# Altium PCB lononTV.PcbDoc
Units mm, origin at the board's own origin, x right, y up, seen from the top; angles counter-clockwise.
Board outline 59.36 x 60.2 mm, 2 copper layers (Top Layer, Bottom Layer); 59 components, 56 nets, 266 pads, 221 vias.
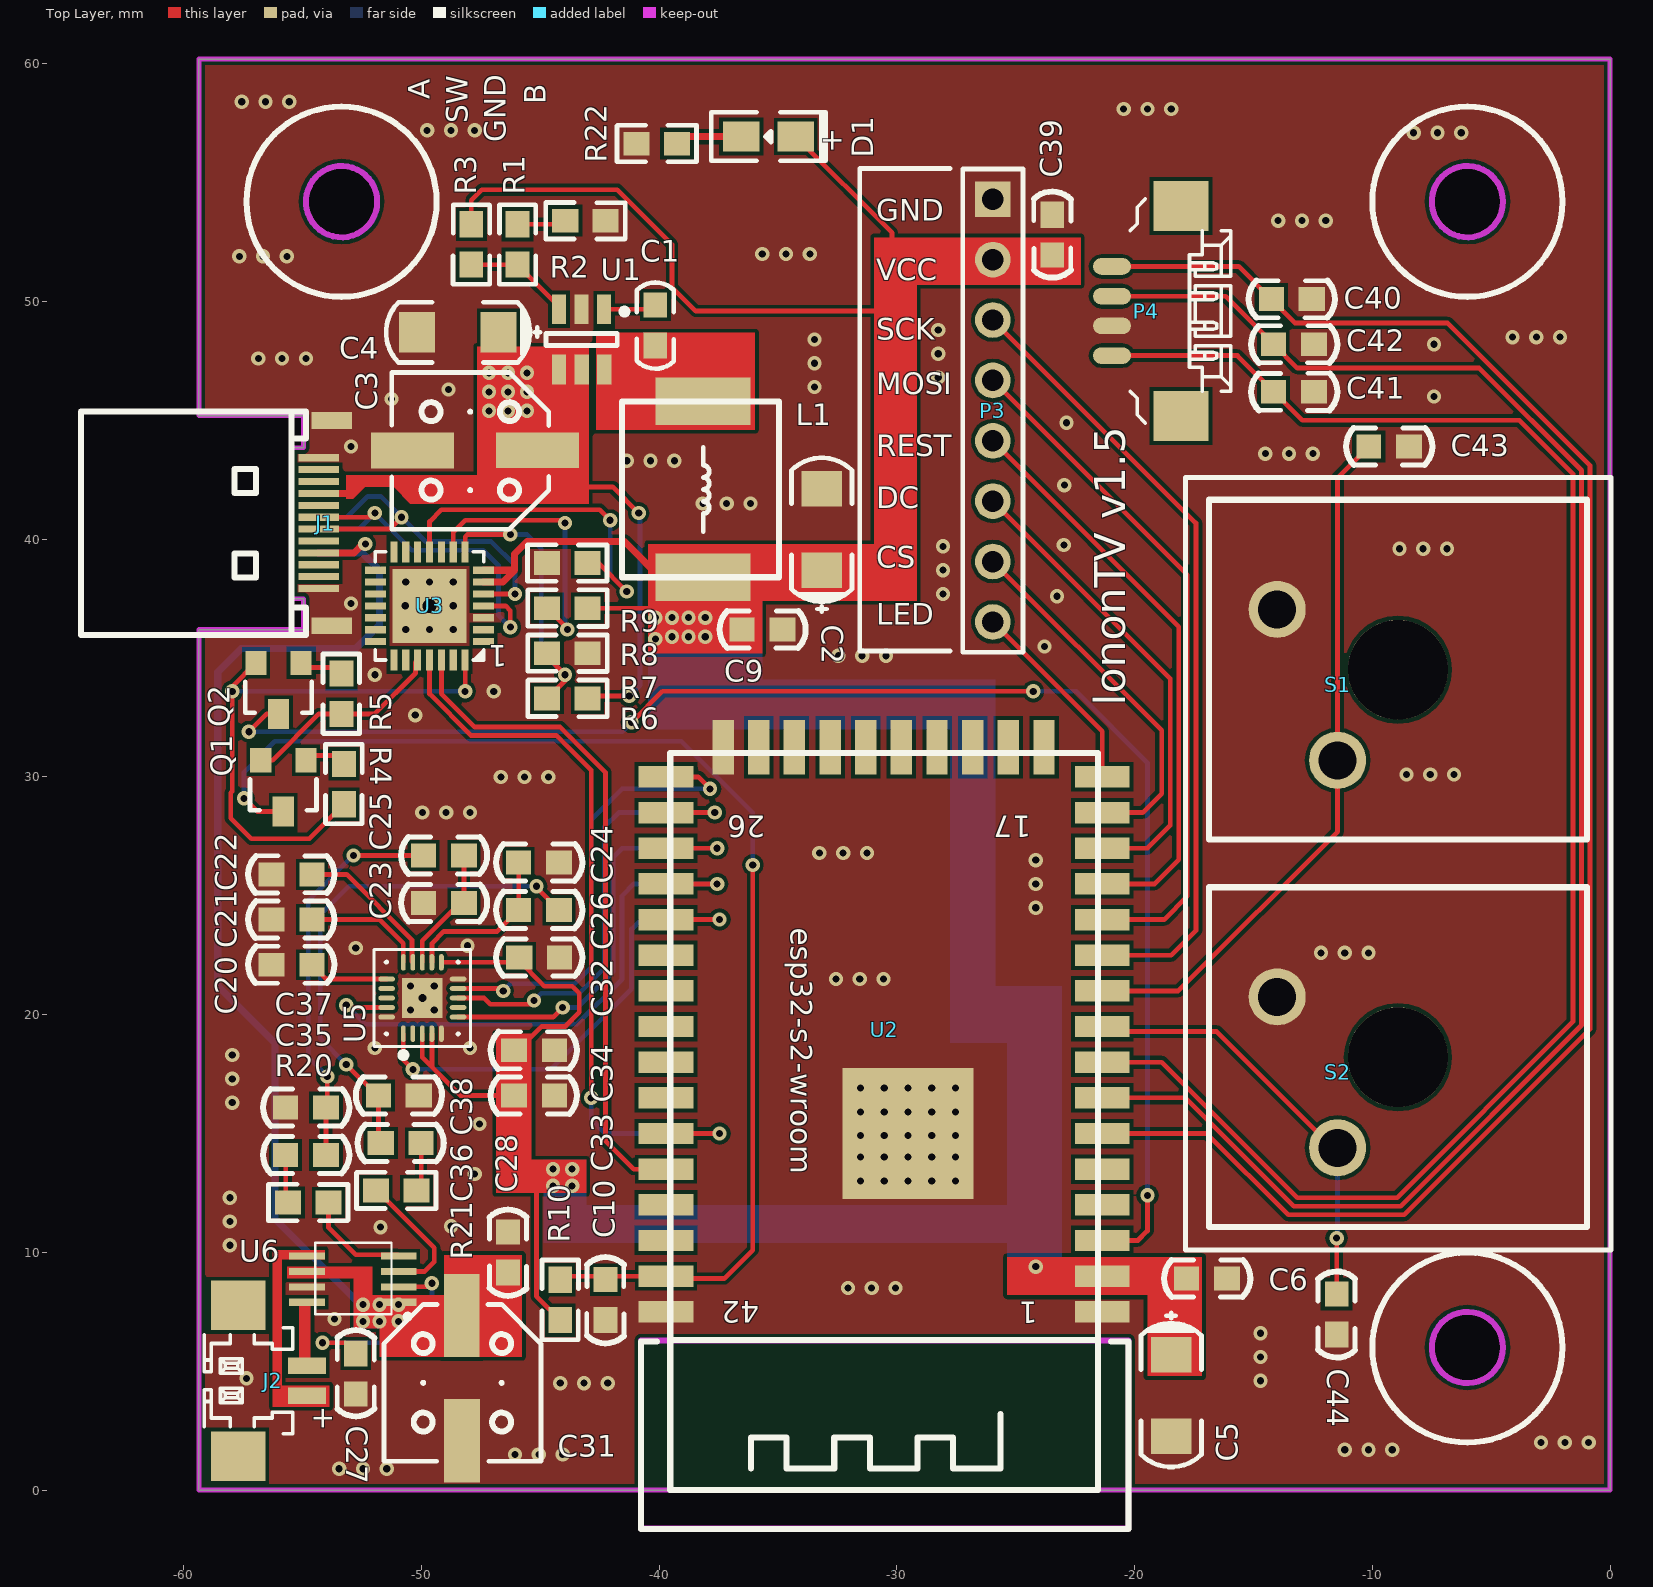
[diagram p0: Top Layer view]
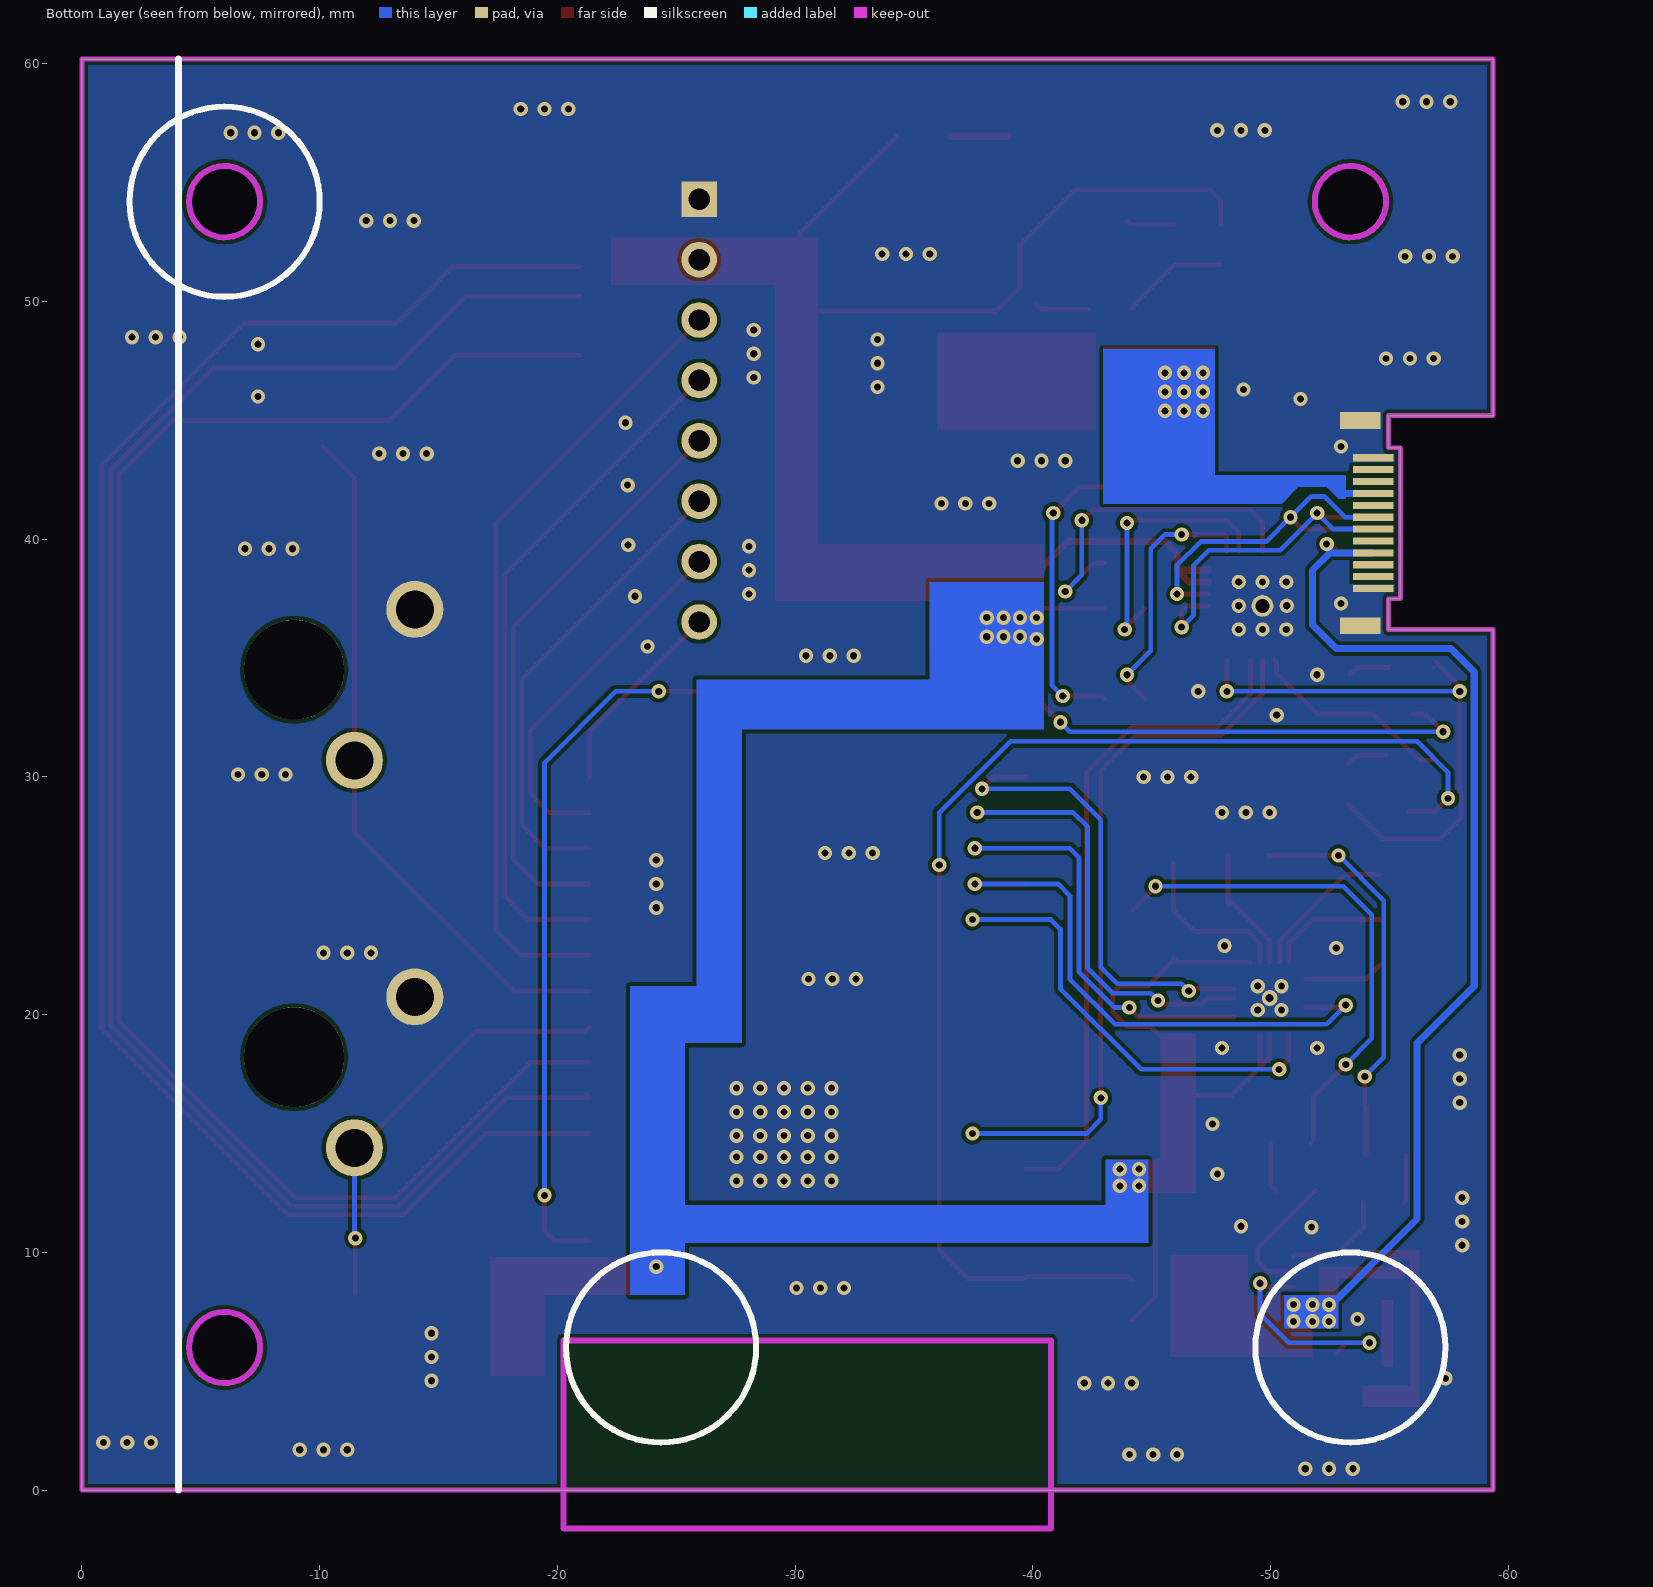
[diagram p1: Bottom Layer view, seen from below]

## Layer stack, top to bottom
Top Layer: signal copper 0.0356
Dielectric: dielectric 0.32, FR-4, Dk 4.8
Bottom Layer: signal copper 0.0356

## Board outline
-59.36,18.6 -59.36,36.2 -54.96,36.2 -54.96,37.5 -55.46,37.5 -55.46,43.85 -54.96,43.85 -54.96,45.2 -59.36,45.2 -59.36,60.2 0,60.2 0,0 -59.36,0
cut-out: -7.5,54.2 ccw(c-6,54.2) -6,52.7 ccw(c-6,54.2) -4.5,54.2 ccw(c-6,54.2) -6,55.7 ccw(c-6,54.2)
cut-out: -53.36,52.7 cw(c-53.36,54.2) -54.86,54.2 cw(c-53.36,54.2) -53.36,55.7 cw(c-53.36,54.2) -51.86,54.2 cw(c-53.36,54.2)
cut-out: -7.5,6 ccw(c-6,6) -6,4.5 ccw(c-6,6) -4.5,6 ccw(c-6,6) -6,7.5 ccw(c-6,6)

## Design rules (kind name [scope] priority, off if disabled: settings)
Clearance [All] p1: gap=0.16
ComponentClearance [All] p1 off: gap=0.254 collisioncheckmode=3 verticalgap=0.254 showdistances=FALSE
PolygonConnect [All] p1: connectstyle=Direct reliefconductorwidth=0.254 reliefentries=4 polygonreliefangle="90 Angle"
RoutingVias [All] p1: holewidth=0.3 width=0.6 viastyle="Through Hole" minholewidth=0.3 minwidth=0.6 maxholewidth=0.3 maxwidth=0.6
SilkscreenOverComponentPads [All] p1: minsilkscreentomaskgap=0.254
SolderMaskExpansion [All] p1: expansion=0.102
Width [All] p1: maxlimit=0.3 minlimit=0.2 preferedwidth=0.2
26 further rules are at their usual default settings.

## Components (designator, comment, footprint, x,y, rotation, side; value= is the part's Value field where it differs from the comment)
C1 "100nF" 0603C -40.16,49 r270 top
C2 "10uF" 1206-A -33.16,38.7 r90 top
C3 "220uF" 铝电容6.6 -47.76,43.7 r0 top
C4 "10uF" 1206-A -46.76,48.7 r180 top
C5 "10uF/16v" 1206-A -18.46,5.7 r270 top
C6 "104" "C0603 - duplicate" -16.96,8.9 r0 top
C9 "104" "C0603 - duplicate" -35.66,36.2 r0 top
C10 "105" "C0603 - duplicate" -42.26,8 r270 top
C20 "105" "C0603 - duplicate" -55.46,22.1 r180 top
C21 "105" "C0603 - duplicate" -55.46,24 r180 top
C22 "105" "C0603 - duplicate" -55.46,25.9 r180 top
C23 "22p" "C0603 - duplicate" -49.06,24.7 r0 top
C24 "22p" "C0603 - duplicate" -45.06,26.4 r0 top
C25 "105" "C0603 - duplicate" -49.06,26.7 r0 top
C26 "105" "C0603 - duplicate" -45.06,24.4 r0 top
C27 "105" "C0603 - duplicate" -52.76,4.9 r90 top
C28 "104" "C0603 - duplicate" -46.36,10 r270 top
C31 "220uF" 铝电容6.6 -48.26,4.7 r90 top
C32 "105" "C0603 - duplicate" -45.032,22.4 r180 top
C33 "104" "C0603 - duplicate" -45.26,16.6 r180 top
C34 "104" "C0603 - duplicate" -45.26,18.5 r180 top
C35 "104" "C0603 - duplicate" -54.86,14.1 r0 top
C36 "104" "C0603 - duplicate" -50.86,14.6 r180 top
C37 "22p" "C0603 - duplicate" -54.86,16.1 r0 top
C38 "22p" "C0603 - duplicate" -50.96,16.6 r0 top
C39 "104" "C0603 - duplicate" -23.46,52.8 r90 top
C40 "104" "C0603 - duplicate" -13.4,50.1 r0 top
C41 "104" "C0603 - duplicate" -13.3,46.2 r0 top
C42 "104" "C0603 - duplicate" -13.3,48.2 r0 top
C43 "104" "C0603 - duplicate" -9.3,43.9 r0 top
C44 "104" "C0603 - duplicate" -11.5,7.4 r270 top
D1 "" d0805 -35.4,56.94 r180 top
J1 "" TYPE-C夹板C2856664 -53.76,45 r270 top
J2 "SPK" "MX1.25-2P 立" -56.26,4.6 r90 top
L1 "6.8uH" 电感7.4*6.6 -34.96,45.8 r270 top
P3 "Header 8" HDR1X8 -25.96,54.3 r270 top
P4 "Header 4" "MX1.25-4P 卧" -19.5,49.6 r270 top
Q1 "8050" 3904 -54.86,30.7 r180 top
Q2 "8050" 3904 -55.06,34.8 r180 top
R1 "10k" 0603R -45.96,52.401 r270 top
R2 "1.3k" 0603R -43.1,53.4 r180 top
R3 "51k" 0603R -47.9,52.4 r270 top
R4 "10K" R0603 -53.26,29.7 r90 top
R5 "10K" R0603 -53.366,33.499 r90 top
R6 "22.1K" R0603 -43.86,33.3 r0 top
R7 "47.5K" R0603 -43.86,35.2 r0 top
R8 "2K" R0603 -43.86,37.1 r0 top
R9 "10K" R0603 -43.86,39 r180 top
R10 "10K" 0603R -44.16,8 r90 top
R20 "150K" 0603R -54.76,12.1 r180 top
R21 "150K" 0603R -51.06,12.6 r0 top
R22 "330R" 0603R -40.1,56.64 r0 top
S1 "6X6X6mm" C400237_KT红轴 -11.46,30.7 r90 top
S2 "6X6X6mm" C400237_KT红轴 -11.46,14.4 r90 top
U1 "STI3470" SOT-23-6L -43.26,48.4 r270 top
U2 "esp32-s2-wroom" ESP32-S2-WROOM -21.46,7.5 r180 top
U3 "CP2102N" "QFN 28-pin-05P" -49.66,37.2 r90 top
U5 "ES8311" QFN20_3*3 -50.76,19.2 r90 top
U6 "NS4150" MSOP8 -50.96,7.9 r180 top

## Footprints (in the part's own frame and the unit in brackets; to place one, negate y for a bottom-side part, rotate by r counter-clockwise, add the part's x,y. Pads: shape width x height; smd on the part's side, far side on the other; paste and mask are expansions set on the pad)
0603C [mm]
  rect 1.05x1 smd: 1(-0.85,0)
  rect 1.1x1 smd: 2(0.85,0)
  silkscreen extent -1.8,-0.78 1.83,0.78
0603R [mm]
  rect 1.1x1 smd: 1(-0.85,0) 2(0.85,0)
  silkscreen extent -1.67,-0.77 1.67,0.77
1206-A [mm]
  rect 1.5x1.7 smd: 1(0,0) 2(3.429,0)
  silkscreen extent -1.76,-1.27 4.72,1.27
3904 [mm]
  rect 0.889x1.016 smd: 1(0,0) 3(1.9,0)
  rect 0.9x1.27 smd: 2(0.95,2.15)
  silkscreen extent -0.45,0.8 2.35,2.1
"C0603 - duplicate" [mm]
  rect 1.05x1 smd: 1(-0.85,0)
  rect 1.1x1 smd: 2(0.85,0)
  silkscreen extent -1.8,-0.78 1.83,0.78
C400237_KT红轴 [mm]
  round 2.4 hole 1.6: 1(0,0) 2(6.35,2.54)
  round 4.2 hole 4.2 unplated: ""(3.81,-2.54)
  silkscreen extent -3.34,-10.49 10.96,5.4
d0805 [mil]
  rect 60x50 smd: A(-45,0) K(45,0)
  silkscreen extent -95,-40 95,40
ESP32-S2-WROOM [mm]
  rect 2.3x0.9 smd: 1(-0.1,0) 2(-0.1,-1.5) 3(-0.1,-3) 4(-0.1,-4.5) 5(-0.1,-6) 6(-0.1,-7.5) 7(-0.1,-9) 8(-0.1,-10.5) 9(-0.1,-12) 10(-0.1,-13.5) 11(-0.1,-15) 12(-0.1,-16.5) 13(-0.1,-18) 14(-0.1,-19.5) 15(-0.1,-21) 16(-0.1,-22.5) 27(18.25,-22.5) 28(18.25,-21) 29(18.25,-19.5) 30(18.25,-18) 31(18.25,-16.5) 32(18.25,-15) 33(18.25,-13.5) 34(18.25,-12) 35(18.25,-10.5) 36(18.25,-9) 37(18.25,-7.5) 38(18.25,-6) 39(18.25,-4.5) 40(18.25,-3) 41(18.25,-1.5) 42(18.25,0)
  rect 0.9x2.3 smd: 17(2.35,-23.75) 18(3.85,-23.75) 19(5.35,-23.75) 20(6.85,-23.75) 21(8.35,-23.75) 22(9.85,-23.75) 23(11.35,-23.75) 24(12.85,-23.75) 25(14.35,-23.75) 26(15.85,-23.75)
  rect 5.5x5.5 smd: 43(8.073,-7.5)
  Keep-Out Layer lines w0.254: 19.3,9.11 -1.2,9.11 -1.2,1.21 19.3,1.21 19.3,9.11
  silkscreen extent -1.2,-23.51 19.3,9.14
HDR1X8 [mm] "Connector; Header; 8 Position"
  rect 1.5x1.5 hole 0.9: 1(0,0)
  round 1.5 hole 0.9: 2(2.54,0) 3(5.08,0) 4(7.62,0) 5(10.16,0) 6(12.7,0) 7(15.24,0) 8(17.78,0)
  silkscreen extent -1.27,-1.27 19.05,1.27
MSOP8 [mm]
  rect 1.5x0.3 smd: 1(0,0) 2(0,-0.65) 3(0,-1.3) 4(0,-1.95) 5(3.85,-1.95) 6(3.85,-1.3) 7(3.85,-0.65) 8(3.85,0)
  silkscreen extent -0.46,-2.5 3.5,0.68
"MX1.25-2P 立" [mm]
  rect 2.1x2.3 smd: 0(-3.175,1.45) 0(3.175,1.45)
  rect 0.7x1.6 smd: 1(-0.625,-1.45) 2(0.625,-1.45)
  silkscreen extent -2.23,-0.84 2.23,2.88
"MX1.25-4P 卧" [mm]
  rect 2.1x2.3 smd: 0(-4.425,1.45) 0(4.425,1.45)
  oval 0.7x1.6 smd: 1(1.875,-1.45) 2(0.625,-1.45) 3(-0.625,-1.45) 4(-1.875,-1.45)
  silkscreen extent -4.71,-0.69 4.71,3.55
QFN20_3*3 [mm]
  oval 0.7x0.2 smd: 1(0,0) 2(0,-0.4) 3(0,-0.8) 4(0,-1.2) 5(0,-1.6) 11(3,-1.6) 12(3,-1.2) 13(3,-0.8) 14(3,-0.4) 15(3,0)
  oval 0.2x0.7 smd: 6(0.7,-2.3) 7(1.1,-2.3) 8(1.5,-2.3) 9(1.9,-2.3) 10(2.3,-2.3) 16(2.3,0.7) 17(1.9,0.7) 18(1.5,0.7) 19(1.1,0.7) 20(0.7,0.7)
  rect 1.7x1.7 smd: 21(1.5,-0.8)
  silkscreen extent -1.02,-2.83 3.53,1.23
"QFN 28-pin-05P" [mm]
  rect 0.3x0.88 smd: 1(-1.506,-2.276) 2(-1.006,-2.276) 3(-0.506,-2.276) 4(-0.006,-2.276) 5(0.494,-2.276) 6(0.994,-2.276) 7(1.494,-2.276) 15(1.494,2.274) 16(0.994,2.274) 17(0.494,2.274) 18(-0.006,2.274) 19(-0.506,2.274) 20(-1.006,2.274) 21(-1.506,2.274)
  rect 0.88x0.3 smd: 8(2.269,-1.501) 9(2.269,-1.001) 10(2.269,-0.501) 11(2.269,-0.001) 12(2.269,0.499) 13(2.269,0.999) 14(2.269,1.499) 22(-2.281,1.499) 23(-2.281,0.999) 24(-2.281,0.499) 25(-2.281,-0.001) 26(-2.281,-0.501) 27(-2.281,-1.001) 28(-2.281,-1.501)
  round 0.6 hole 0.3: 29(-0.996,-0.998) 29(-0.996,0.002) 29(-0.996,1.002) 29(0.004,1.018) 29(0.004,-0.998) 29(1.004,-0.998) 29(1.004,0.002) 29(1.004,1.002)
  round 0.914 hole 0.6: 29(-0.006,-0.001)
  rect 3.1x3.1 smd: 29(-0.006,-0.001)
  silkscreen extent -2.28,-2.28 2.27,2.27
R0603 [mm]
  rect 1.1x1 smd: 1(-0.85,0) 2(0.85,0)
  silkscreen extent -1.67,-0.77 1.67,0.77
SOT-23-6L [mm] "SOT23, 6-Leads, Body 3.0x2.9mm (max), Pitch 0.95mm, IPC Medium Density"
  rect 1.25x0.6 smd: 1(-1.272,0.945) 2(-1.272,-0.005) 3(-1.272,-0.955) 4(1.265,-0.95) 5(1.265,0) 6(1.265,0.95)
  silkscreen extent -1.3,-1.5 0.25,1.93
TYPE-C夹板C2856664 [mm]
  rect 0.7x1.7 smd: 25(0.004,-0.009) 25(8.644,-0.009)
  rect 0.7x1.7 smd far side: 26(0.004,-0.009) 26(8.644,-0.009)
  rect 0.3x1.7 smd: A1(1.574,-0.559) A2(2.074,-0.559) A3(2.574,-0.559) A4(3.074,-0.559) A5(3.574,-0.559) A6(4.074,-0.559) A7(4.574,-0.559) A8(5.074,-0.559) A9(5.574,-0.559) A10(6.074,-0.559) A11(6.574,-0.559) A12(7.074,-0.559)
  rect 0.3x1.7 smd far side: B1(7.074,-0.559) B2(6.574,-0.559) B3(6.074,-0.559) B4(5.574,-0.559) B5(5.074,-0.559) B6(4.574,-0.559) B7(4.074,-0.559) B8(3.574,-0.559) B9(3.074,-0.559) B10(2.574,-0.559) B11(2.074,-0.559) B12(1.574,-0.559)
  silkscreen extent -0.38,-10.56 9.02,-1.09
电感7.4*6.6 [mm]
  rect 2x4 smd: 1(0,-3.2) 2(7.4,-3.2)
  silkscreen extent 0,-6.6 7.4,0
铝电容6.6 [mm]
  rect 3.5x1.5 smd: 1(2.64,0.04) 2(-2.62,0.03)
  silkscreen extent -3.49,-3.29 3.11,3.31

## Part data
C1: library part CAP, "贴片电容"
C2 C3 C4: library part CAPACITOR, "钽电容"
C5 C31: library part CAPACITOR, "Capacitor"
C6 C9 C10 C20 C21 C22 C23 C24 C25 C26 C27 C28 C32 C33 C34 C35 C36 C37 C38 C39 C40 C41 C42 C43 C44: library part CAP, "Capacitor"
D1: library part LED
J1: library part TYPE-C夹板C2856664
J2: library part CON2
L1: library part Inductor, "Inductor"
P3: "Header, 8-Pin"
P4: "Header, 4-Pin"
Q1 Q2: library part NPN, "NPN Transistor"
R1 R2 R3 R4 R5 R6 R7 R8 R9 R10 R20 R21 R22: library part RES1
S1 S2: library part SW-PB, "Switch"
U1: library part RT7285/A

## Via types
v1: diameter 0.6, hole 0.3, Top Layer to Bottom Layer, tented both sides, 220 vias
v2: diameter 0.66, hole 0.33, Top Layer to Bottom Layer, tented both sides, 1 vias

## Nets (pads, with @x,y where several pads share a name; then routed paths per layer and width w, separated by ;. In a path a pad name is that pad's centre, name@x,y a point inside that pad or via, vN(x,y) a via of type N, cw(c..) or ccw(c..) an arc to the next point about the centre after c; other vN are vias at no path point)
BUTTON_1: C43.1 S1.1 U2.10 | length 29.4
  Top Layer w0.2: U2.10 -18.16,21 -11.46,27.7 S1.1 -11.46,42.59 C43.1
BUTTON_2: C44.1 S2.1 U2.9 | length 18.2
  Top Layer w0.2: U2.9 -21.15,19.29 -16.55,19.29 -11.66,14.4 S2.1 ; C44.1 v1(-11.5,10.6)
  Bottom Layer w0.2: v1(-11.5,10.6) -11.46,10.64 S2.1
CTS: U3.23
DCD: U3.1
DECODER_A: C40.1 P4.4 U2.6 | length 72.5
  Top Layer w0.2: U2.6 -16.96,15 -13.54,11.58 -8.662,11.58 -0.84,19.402 -0.84,43.1 -6.84,49.1 -7.04,49.1 -13.25,49.1 -13.325,49.175 C40.1 -15.625,51.475 P4.4
DECODER_B: C41.1 P4.1 U2.8 | length 69.7
  Top Layer w0.2: U2.8 -18.86,18 -13.16,12.3 -8.96,12.3 -1.56,19.7 -1.56,40.8 -1.56,42.751 -3.809,45 -12.95,45 C41.1 -15.675,47.725 P4.1
DECODER_SW2: C42.1 P4.3 U2.7 | length 71.5
  Top Layer w0.2: U2.7@-21.22,16.64 U2.7 -17.869,16.5 -13.309,11.94 -8.811,11.94 -1.2,19.551 -1.2,41.6 -1.2,42.9 -5.5,47.2 -13.15,47.2 C42.1 -16.175,50.225 P4.3
DN: J1.A7 J1.B7 U3.5 | length 16
  Top Layer w0.2: J1.A7 -51.334,40.426 v1(-50.834,40.926) ; U3.5 v1@-46.06,37.694
  Bottom Layer w0.2: J1.B7 -53.134,40.926 -52.26,41.8 -51.708,41.8 v1(-50.834,40.926) -49.808,39.9 -47.06,39.9 -46.06,38.9 v1(-46.06,37.7)
DP: J1.A6 J1.B6 U3.4 | length 15.7
  Top Layer w0.2: J1.A6 v1@-52.134,40.926 ; U3.4@-47.378,37.2 U3.4 -46.454,37.194 -46.26,37 v1(-46.26,36.3)
  Bottom Layer w0.2: J1.B6 -52.634,40.426 v1(-51.96,41.1) -50.4,39.54 -47.4,39.54 -46.76,38.9 -46.76,36.8 v1(-46.26,36.3)
DSR: U3.27
DTR: Q2.3 R4.1 U3.28 | length 23.8
  Top Layer w0.2: Q2.3 -57.96,33.8 v1(-57.96,33.6) -57.96,29.392 -58.02,29.332 -58.02,28.26 -57.16,27.4 -54.71,27.4 R4.1 ; v1@-48.159,33.601 U3.28
  Bottom Layer w0.2: v1(-57.96,33.6) v1(-48.16,33.6)
ES_N: C25.1 C35.2 C37.2 | length 16.7
  Top Layer w0.2: C35.2 C37.2 -53.96,16.15 v1(-53.96,17.4) ; v1(-52.86,26.7) C25.1
  Bottom Layer w0.2: v1(-53.96,17.4) -54.76,18.2 -54.76,24.8 v1(-52.86,26.7)
ES_P: C26.2 C36.2 C38.1 | length 21.7
  Top Layer w0.2: v1(-53.16,17.9) -51.86,16.6 C38.1 -51.81,14.7 C36.2 ; v1(-45.16,25.4) -45.16,25.35 C26.2
  Bottom Layer w0.2: v1(-53.16,17.9) -54.26,19 -54.26,24.2 -53.06,25.4 v1(-45.16,25.4)
ESP32_RESET: C10.1 Q1.2 R10.2 U2.41 | length 53.3
  Top Layer w0.2: v1(-57.46,29.1) -56.91,28.55 Q1.2 ; R10.2 -44.01,9 U2.41 -39.61,8.9 -37.26,8.9 -36.06,10.1 v1(-36.06,26.3)
  Bottom Layer w0.2: v1(-57.46,29.1) -57.46,30.2 -56.16,31.5 -39.06,31.5 -36.06,28.5 v1(-36.06,26.3)
GND: C2.2 C3.2 C4.2 C5.2 C6.2 C9.2 C10.2 C20.2 C21.2 C22.2 C23.1 C24.2 C27.1 C28.1 C31.2 C32.1 C33.1 C34.1 C37.1 C38.2 C39.2 C40.2 C41.2 C42.2 C43.2 C44.2 J1.25 J1.26 J1.A1 J1.A12 J1.B1 J1.B12 P3.1 P4.2 R2.1 R7.2 R9.2 R22.1 S1.2 S2.2 U1.2 U2.1 U2.26 U2.42 U2.43 U3.3 U3.29 U5.5 U5.10 U5.20 U5.21 U6.7
  other v1: -53.46,0.9 -52.46,0.9 -51.46,0.9 -46.06,1.5 -45.06,1.5 -44.06,1.5 -11.16,1.7 -10.16,1.7 -9.16,1.7 -2.9,2 -1.9,2 -0.9,2 -44.16,4.5 -43.16,4.5 -42.16,4.5 -14.7,4.6 -57.36,4.7 -14.7,5.6 -14.7,6.6 -53.66,7.2 -32.06,8.5 -31.06,8.5 -30.06,8.5 -58.06,10.3 -51.721,11.061 -48.76,11.1 -58.06,11.3 -58.06,12.3 -31.533,13.01 -30.533,13.01 -29.533,13.01 -28.533,13.01 -27.533,13.01 -47.76,13.3 -31.533,14.01 -30.533,14.01 -29.533,14.01 -28.533,14.01 -27.533,14.01 -31.533,14.91 -30.533,14.91 -29.533,14.91 -28.533,14.91 -27.533,14.91 -47.56,15.4 -31.533,15.91 -30.533,15.91 -29.533,15.91 -28.533,15.91 -27.533,15.91 -57.96,16.3 -31.533,16.91 -30.533,16.91 -29.533,16.91 -28.533,16.91 -27.533,16.91 -57.96,17.3 -57.96,18.3 -51.96,18.6 -47.96,18.6 -50.46,20.2 -49.46,20.2 -50.46,21.2 -49.46,21.2 -32.56,21.5 -31.56,21.5 -30.56,21.5 -12.16,22.6 -11.16,22.6 -10.16,22.6 -52.76,22.8 -48.06,22.9 -24.16,24.5 -24.16,25.5 -24.16,26.5 -33.26,26.8 -32.26,26.8 -31.26,26.8 -49.96,28.5 -48.96,28.5 -47.96,28.5 -46.66,30 -45.66,30 -44.66,30 -8.56,30.1 -7.56,30.1 -6.56,30.1 -50.26,32.6 -46.96,33.6 -51.96,34.3 -32.46,35.1 -31.46,35.1 -30.46,35.1 -23.786,35.486 -52.96,37.3 -23.26,37.6 -28.06,37.7 -28.06,38.7 -8.86,39.6 -7.86,39.6 -6.86,39.6 -28.06,39.7 -22.977,39.757 -38.16,41.5 -37.16,41.5 -36.16,41.5 -22.955,42.275 -41.36,43.3 -40.36,43.3 -39.36,43.3 -14.5,43.6 -13.5,43.6 -12.5,43.6 -52.96,43.9 -22.86,44.9 -51.26,45.9 -7.4,46 -48.86,46.3 -33.46,46.4 -28.26,46.8 -33.46,47.4 -56.86,47.6 -55.86,47.6 -54.86,47.6 -28.26,47.8 -7.4,48.2 -33.46,48.4 -4.1,48.5 -3.1,48.5 -2.1,48.5 -28.26,48.8 -57.66,51.9 -56.66,51.9 -55.66,51.9 -35.66,52 -34.66,52 -33.66,52 -13.96,53.4 -12.96,53.4 -11.96,53.4 -8.26,57.1 -7.26,57.1 -6.26,57.1 -49.76,57.2 -48.76,57.2 -47.76,57.2 -20.46,58.1 -19.46,58.1 -18.46,58.1 -57.56,58.4 -56.56,58.4 -55.56,58.4
  other v2: -49.96,20.7
GPIO0: Q2.2 U2.3 | length 63.1
  Top Layer w0.2: v1(-57.26,31.9) -56.51,32.65 Q2.2 ; v1(-41.16,32.3) -39.86,33.6 v1(-24.26,33.6) ; U2.3 -19.86,10.5 -19.46,10.9 v1(-19.46,12.4)
  Bottom Layer w0.2: v1(-57.26,31.9) -41.56,31.9 v1(-41.16,32.3) ; v1(-24.26,33.6) -22.46,33.6 -19.46,30.6 v1(-19.46,12.4)
I2C_SCL: U2.31 U5.1 | length 20.9
  Top Layer w0.2: U5.1 -50.76,18.1 v1(-50.36,17.7) ; U2.31 v1(-37.46,24)
  Bottom Layer w0.2: v1(-50.36,17.7) -44.56,17.7 -41.16,21.1 -41.16,23.6 -40.76,24 v1(-37.46,24)
I2C_SDA: U2.30 U5.19 | length 24.3
  Top Layer w0.2: v1(-53.16,20.4) -53.06,20.3 U5.19 ; U2.30 v1(-37.56,25.5)
  Bottom Layer w0.2: v1(-53.16,20.4) -52.36,19.6 -43.46,19.6 -41.56,21.5 -41.56,25 -41.06,25.5 v1(-37.56,25.5)
I2S_BCLK: U2.29 U5.6 | length 18.9
  Top Layer w0.2: U5.6 -44.46,19.9 v1(-44.06,20.3) ; U2.29 v1(-37.56,27)
  Bottom Layer w0.2: v1(-44.06,20.3) v1@-43.96,20.4 ; v1@-43.96,20.4 -43.86,20.3 -43.442,20.3 -41.94,21.802 -41.94,26.62 -41.56,27 v1(-37.56,27)
I2S_LRCK: U2.28 U5.8 | length 19.8
  Top Layer w0.2: U5.8 -47.36,20.7 -47.1,20.44 -45.42,20.44 v1(-45.26,20.6) ; U2.28 v1(-37.66,28.5)
  Bottom Layer w0.2: v1(-45.26,20.6) -44.96,20.9 -43.351,20.9 -42.3,21.951 -42.3,27.9 -41.7,28.5 v1(-37.66,28.5)
I2S_SDO: U2.27 U5.9 | length 19.9
  Top Layer w0.2: U5.9 -46.66,21.1 v1(-46.56,21) ; U2.27 -38.36,30 v1(-37.86,29.5)
  Bottom Layer w0.2: v1(-46.56,21) -46.26,21.3 -43.56,21.3 -42.86,22 -42.86,28.2 -41.56,29.5 v1(-37.86,29.5)
NetC1_1: C1.1 U1.1 | length 2.2
  Top Layer w0.2: U1.1 -40.338,49.672 C1.1
NetC1_2: C1.2 L1.1 U1.6
NetC20_1: C20.1 U5.16 | length 3.4
  Top Layer w0.2: C20.1 -54.01,21.5 U5.16
NetC21_1: C21.1 U5.15 | length 5.1
  Top Layer w0.2: C21.1 -51.76,24 -50.76,23 U5.15
NetC22_1: C22.1 U5.14 | length 6.3
  Top Layer w0.2: C22.1 -53.151,25.9 -50.4,23.149 -50.4,22.24 U5.14
NetC23_2: C23.2 C25.2 U5.13 | length 5.3
  Top Layer w0.2: U5.13 -49.96,23.1 -48.36,24.7 C23.2 C25.2
NetC24_1: C24.1 C26.1 U5.12 | length 7
  Top Layer w0.2: U5.12 -49.56,22.991 -49.051,23.5 -46.81,23.5 C26.1 C24.1
NetC27_2: C27.2 U6.2 | length 9.4
  Top Layer w0.2: v1(-54.16,6.2) -53.21,6.2 C27.2 ; U6.2 -49.81,8.55 -49.66,8.7 v1(-49.56,8.7)
  Bottom Layer w0.2: v1(-54.16,6.2) -50.76,6.2 -49.56,7.4 v1(-49.56,8.7)
NetC35_1: C35.1 R20.2 | length 2
  Top Layer w0.2: C35.1 -55.71,12.2 R20.2
NetC36_1: C36.1 R21.2 | length 2.1
  Top Layer w0.2: R21.2 -50.01,12.8 C36.1
NetD1_K: D1.K R22.2 | length 2.4
  Top Layer w0.3: R22.2@-38.95,56.94 D1.K
NetQ1_1: Q1.1 R4.2 | length 1.7
  Top Layer w0.2: Q1.1@-54.86,30.9 -53.61,30.9 R4.2
NetQ2_1: Q2.1 R5.2 | length 1.7
  Top Layer w0.2: Q2.1@-54.96,34.6 -53.617,34.6 R5.2
NetR1_1: R1.1 R2.2 | length 2.1
  Top Layer w0.2: R1.1 -44.099,53.251 R2.2
NetR1_2: R1.2 R3.2 U1.3 | length 4.5
  Top Layer w0.2: R3.2@-47.899,51.551 R1.2 -44.215,49.806 U1.3
NetR6_1: R6.1 R7.1 U3.8 | length 12.4
  Top Layer w0.2: U3.8 -48.159,40.101 -48.06,40.2 v1(-46.26,40.2) ; R6.1 -43.96,34.05 v1(-43.96,34.3) -44.71,35.05 R7.1
  Bottom Layer w0.2: v1(-46.26,40.2) -45.56,40.2 -44.96,39.6 -44.96,35.3 v1(-43.96,34.3)
NetR8_1: R8.1 U3.9 | length 11.6
  Top Layer w0.2: U3.9 -48.659,40.301 -48.16,40.8 -44.08,40.8 v1(-43.96,40.68) ; R8.1 -43.86,36.25 v1(-43.86,36.2)
  Bottom Layer w0.2: v1(-43.96,40.68) -43.96,36.3 v1(-43.86,36.2)
NetR9_1: R9.1 U3.11 | length 14.7
  Top Layer w0.2: U3.11 -49.659,40.741 -49.16,41.24 -42.5,41.24 v1(-42.06,40.8) ; R9.1 -42.56,39 v1(-41.36,37.8)
  Bottom Layer w0.2: v1(-42.06,40.8) -42.06,38.5 v1(-41.36,37.8)
PA_INL+: R21.1 U6.3 | length 5.7
  Top Layer w0.2: R21.1 -51.86,12.6 -49.46,10.2 -49.46,9.6 -49.86,9.2 U6.3
PA_INL-: R20.1 U6.4 | length 4.5
  Top Layer w0.2: R20.1 -53.91,11.05 -52.76,9.9 -51.01,9.9 U6.4
PA_OUTL+: J2.2 U6.8
PA_OUTL-: J2.1 U6.5
RI: U3.2
RTS: Q1.3 R5.1 U3.24 | length 8.6
  Top Layer w0.2: Q1.3 -56.26,30.7 -54.311,32.649 R5.1 -51.971,32.649 -50.249,34.371 -50.249,34.829 U3.24
SCREEN_CS: P3.7 U2.15 | length 15.5
  Top Layer w0.2: P3.7 -18.86,31.96 -18.86,29.3 -19.66,28.5 U2.15
SCREEN_DC: P3.6 U2.14 | length 20
  Top Layer w0.2: P3.6 -18.5,34.14 -18.5,27.96 -19.46,27 U2.14
SCREEN_LED: P3.8 U2.16 | length 8.4
  Top Layer w0.2: P3.8 -21.36,31.92 U2.16
SCREEN_MOSI: P3.4 U2.12 | length 29.1
  Top Layer w0.2: P3.4 -17.78,38.5 -17.78,24.98 -18.76,24 U2.12
SCREEN_RESET: P3.5 U2.13 | length 24.5
  Top Layer w0.2: P3.5 -18.14,36.32 -18.14,26.52 -19.16,25.5 U2.13
SCREEN_SCK: P3.3 U2.11 | length 33.6
  Top Layer w0.2: P3.3 -17.42,40.68 -17.42,23.54 -18.46,22.5 U2.11
U0RXD: U2.38 U3.26 | length 28.2
  Top Layer w0.2: U3.26 -49.159,33.499 -47.76,32.1 -44.16,32.1 -42.26,30.2 -42.26,14.7 -41.06,13.5 U2.38
U0TXD: U2.37 U3.25 | length 32.1
  Top Layer w0.2: U3.25 -49.659,33.49 -47.909,31.74 -44.309,31.74 -42.86,30.291 v1(-42.86,16.5) ; U2.37 v1(-37.46,15)
  Bottom Layer w0.2: v1(-42.86,16.5) -42.86,15.6 -42.26,15 v1(-37.46,15)
VCC: C3.1 C4.1 J1.A4 J1.B9 R6.2 U1.4 U1.5 | length 17
  Top Layer w0.2: -43.56,42.2 -41.96,42.2 v1(-40.86,41.1) ; R6.2 -42.91,33.4 v1(-41.26,33.4)
  Top Layer w0.3: J1.A4 -53.034,41.926 ; -45.12,42.16 C3.1
  Bottom Layer w0.2: v1(-41.26,33.4) -40.8,33.86 -40.8,41.04 v1(-40.86,41.1)
  Bottom Layer w0.3: J1.B9 -53.086,41.926
  other v1: -47.16,45.4 -46.36,45.4 -45.56,45.4 -47.16,46.2 -46.36,46.2 -45.56,46.2 -47.16,47 -46.36,47 -45.56,47
VCC33: C2.1 C5.1 C6.1 C9.1 C32.2 C33.2 C34.2 C39.1 D1.A L1.2 P3.2 R3.1 R8.2 R10.1 U2.2 U3.6 U3.7 U5.3 U5.4 U5.11 | length 66.5
  Top Layer w0.2: U5.3 -49.96,18.2 -49.56,17.8 ; U5.4 -49.56,17.8 ; U5.11 -46.082,22.2 C32.2@-45.957,22.325 ; R3.1 -47.9,54.26 -47.46,54.7 -41.76,54.7 -39.46,52.4 -39.46,50.6 -38.46,49.6 -30.66,49.6 ; C33.2 -48.36,16.6 -49.56,17.8 ; C34.2 -45.955,18.5 -44.955,19.5 -43.96,19.5 -43.36,20.1 -43.36,20.9 -43.66,21.2 -44.832,21.2 C32.2@-45.957,22.325 ; C32.2 C32.2@-45.957,22.325 ; -45.16,12.8 -45.16,8.15 R10.1 ; R8.2 -39.86,37.1 -39.76,37 ; D1.A -30.2,52.883 -30.2,51.5 ; C39.1 C39.1@-23.25,51.74
  Top Layer w0.3: U3.6 -46.566,38.194 -46.08,38.68 -46.08,39.38 -45.56,39.9 -41.46,39.9 L1.2@-39.96,38.4 ; U3.7 -46.094,38.694
  other v1: -24.16,9.4 -44.46,12.8 -43.66,12.8 -44.46,13.5 -43.66,13.5 -40.16,35.8 -39.46,35.9 -38.76,35.9 -38.06,35.9 -40.16,36.7 -39.46,36.7 -38.76,36.7 -38.06,36.7
VCC_SP: C28.2 C31.1 J1.A9 J1.B4 U6.1 U6.6 | length 46.1
  Top Layer w0.3: J1.A9 -52.834,39.426 v1@-52.41,39.85
  Bottom Layer w0.3: J1.B4 -52.486,39.426 ; v1(-52.36,39.8) -52.486,39.674 -52.486,39.426 ; -51.06,7.4 -52.16,7.4 -56.16,11.4 -56.16,18.8 -58.57,21.21 -58.57,34.41 -57.58,35.4 -52.76,35.4 -51.76,36.4 -51.76,38.7 -52.486,39.426
  other v1: -52.46,7.1 -51.76,7.1 -50.96,7.1 -52.46,7.8 -51.76,7.8 -50.96,7.8
pads on no net: J1.A2 J1.A3 J1.A5 J1.A8 J1.A10 J1.A11 J1.B2 J1.B3 J1.B5 J1.B8 J1.B10 J1.B11 J2.0 P4.0 S1. S2. U2.4 U2.5 U2.17 U2.18 U2.19 U2.20 U2.21 U2.22 U2.23 U2.24 U2.25 U2.32 U2.33 U2.34 U2.35 U2.36 U2.39 U2.40 U3.10 U3.12 U3.13 U3.14 U3.15 U3.16 U3.17 U3.18 U3.19 U3.20 U3.21 U3.22 U5.2 U5.7 U5.17 U5.18

## Polygon pours and split planes (outlines as drawn)
GND on Bottom Layer "Top Layer-No Net" (solid, remove dead copper, pour order 1000): -78.2,68.7 -77.5,69.4 17.5,69.4 17.5,-5.8 24.9,-13.2 22.9,-11.2 -69.6,-11.2
GND on Top Layer "Top Layer-No Net" (solid, remove dead copper, pour order 1001): -79.4,69.9 19.9,69.9 25.2,75.2 25.1,75.1 25.1,-14.2 -71.2,-14.2 -73.5,-11.9

## Keep-outs
Keep-Out Layer:
  circle w0.254: c-6,6 r1.5
  circle w0.254: c-53.36,54.2 r1.5
  circle w0.254: c-6,54.2 r1.5
  lines w0.2: -59.36,0 0,0 0,60.2 -59.36,60.2 -59.36,45.2 -54.96,45.2 -54.96,43.85 -55.46,43.85 -55.46,37.5 -54.96,37.5 -54.96,36.2 -59.36,36.2 -59.36,18.6 -59.36,0

## Other copper
Top Layer:
  rectangle net VCC33: -19.46,4.8 -17.16,9.8
  rectangle net VCC_SP: -52.86,6.8 -48.96,8.2
  rectangle net VCC_SP: -52.86,7 -52.06,9.4
  rectangle net VCC_SP: -55.66,8.9 -52.06,9.4
  rectangle net VCC_SP: -49.06,5.6 -45.76,9.9
  rectangle net VCC_SP: -51.76,5.6 -47.46,8.2
  rectangle net PA_OUTL-: -56.26,3.5 -53.86,4.4
  rectangle net PA_OUTL-: -56.26,9.7 -54.06,10.1
  rectangle net PA_OUTL-: -56.26,3.5 -55.86,10.1
  rectangle net PA_OUTL+: -55.16,5.2 -54.66,8
  rectangle net VCC33: -46.86,12.5 -43.06,13.9
  rectangle net VCC33: -46.86,12.5 -45.36,19.2
  rectangle net VCC33: -25.36,8.2 -17.96,9.8
  rectangle net VCC33: -30.96,50.7 -22.26,52.7
  rectangle net VCC33: -30.96,37.4 -29.16,52.7
  rectangle net VCC33: -40.46,37.4 -29.16,39.8
  rectangle net VCC33: -40.46,35.2 -35.66,39.8
  rectangle net NetC1_2: -42.66,44.6 -35.96,48.7
  rectangle net VCC: -47.66,41.5 -42.96,48.1
  region net VCC: -53.16,41.7 -52.86,41.7 -52.36,42.2 -51.16,42.2 -50.46,41.5 -42.96,41.5 -42.96,42.7 -53.16,42.7
Bottom Layer:
  rectangle net VCC_SP: -52.86,6.8 -50.56,8.2
  rectangle net VCC33: -44.86,10.4 -43.06,13.9
  rectangle net VCC33: -44.86,10.4 -23.06,12
  rectangle net VCC33: -25.36,8.2 -23.06,21.2
  rectangle net VCC33: -27.76,18.8 -23.06,21.2
  rectangle net VCC33: -27.76,18.8 -25.86,34.1
  rectangle net VCC33: -37.96,32 -25.86,34.1
  rectangle net VCC33: -40.46,32 -35.66,38.2
  rectangle net VCC: -47.66,41.5 -42.96,48
  region net VCC: -53.16,41.7 -52.86,41.7 -52.36,42.2 -51.16,42.2 -50.46,41.5 -42.96,41.5 -42.96,42.7 -53.16,42.7

## Silkscreen, mask and mechanical layers (free items; w line width, h text height)
Top Overlay:
  circle w0.254: c-6,54.2 r4
  circle w0.254: c-53.36,54.2 r4
  circle w0.254: c-6,6 r4
  lines w0.2: -27.76,35.3 -31.56,35.3 -31.56,55.6 -27.76,55.6 ; -17.86,10.1 -17.86,42.6 0.04,42.6 0.04,10.1 -17.86,10.1
  text "A" at -49.66,58.5 h0.9 r90
  text "B" at -44.76,58.3 h0.9 r90
  text "SW" at -48.06,57.5 h0.9 r90
  text "GND" at -46.46,56.7 h0.9 r90
  text "GND" at -30.86,53.4 h0.9
  text "VCC" at -30.86,50.9 h0.9
  text "SCK" at -30.86,48.4 h0.9
  text "MOSI" at -30.86,46.1 h0.9
  text "REST" at -30.86,43.5 h0.9
  text "DC" at -30.86,41.3 h0.9
  text "CS" at -30.86,38.8 h0.9
  text "LED" at -30.86,36.4 h0.9
  text "lononTV v1.5" at -20.4,33 h1.3 r90
  text "+" at -53.76,2.5 h0.9 r90
Bottom Overlay:
  circle w0.254: c-24.36,6 r4
  circle w0.254: c-53.36,6 r4
  circle w0.254: c-6,54.2 r4
  lines w0.3: -4.06,0 -4.06,60.2

## Text inside footprints (layer, text, board x,y; h text height)
D1: Top Overlay "+" at -32.319,57.284 h0.9 r90
U2: Top Overlay "1" at -24.073,7.92 h0.9 r180; Top Overlay "17" at -24.343,28.36 h0.9 r180; Top Overlay "26" at -35.533,28.36 h0.9 r180; Top Overlay "42" at -35.783,7.95 h0.9 r180
U3: Top Overlay "1" at -46.398,35.538 h0.9 r180